# Altium PCB RobonAUT_PCB.PcbDoc
Units mm, origin at the board's own origin, x right, y up, seen from the top; angles counter-clockwise.
Board outline 153 x 126 mm, 2 copper layers (Top Layer, Bottom Layer), stack 1.586 mm thick; 34 components, 56 nets, 272 pads, 13 vias.
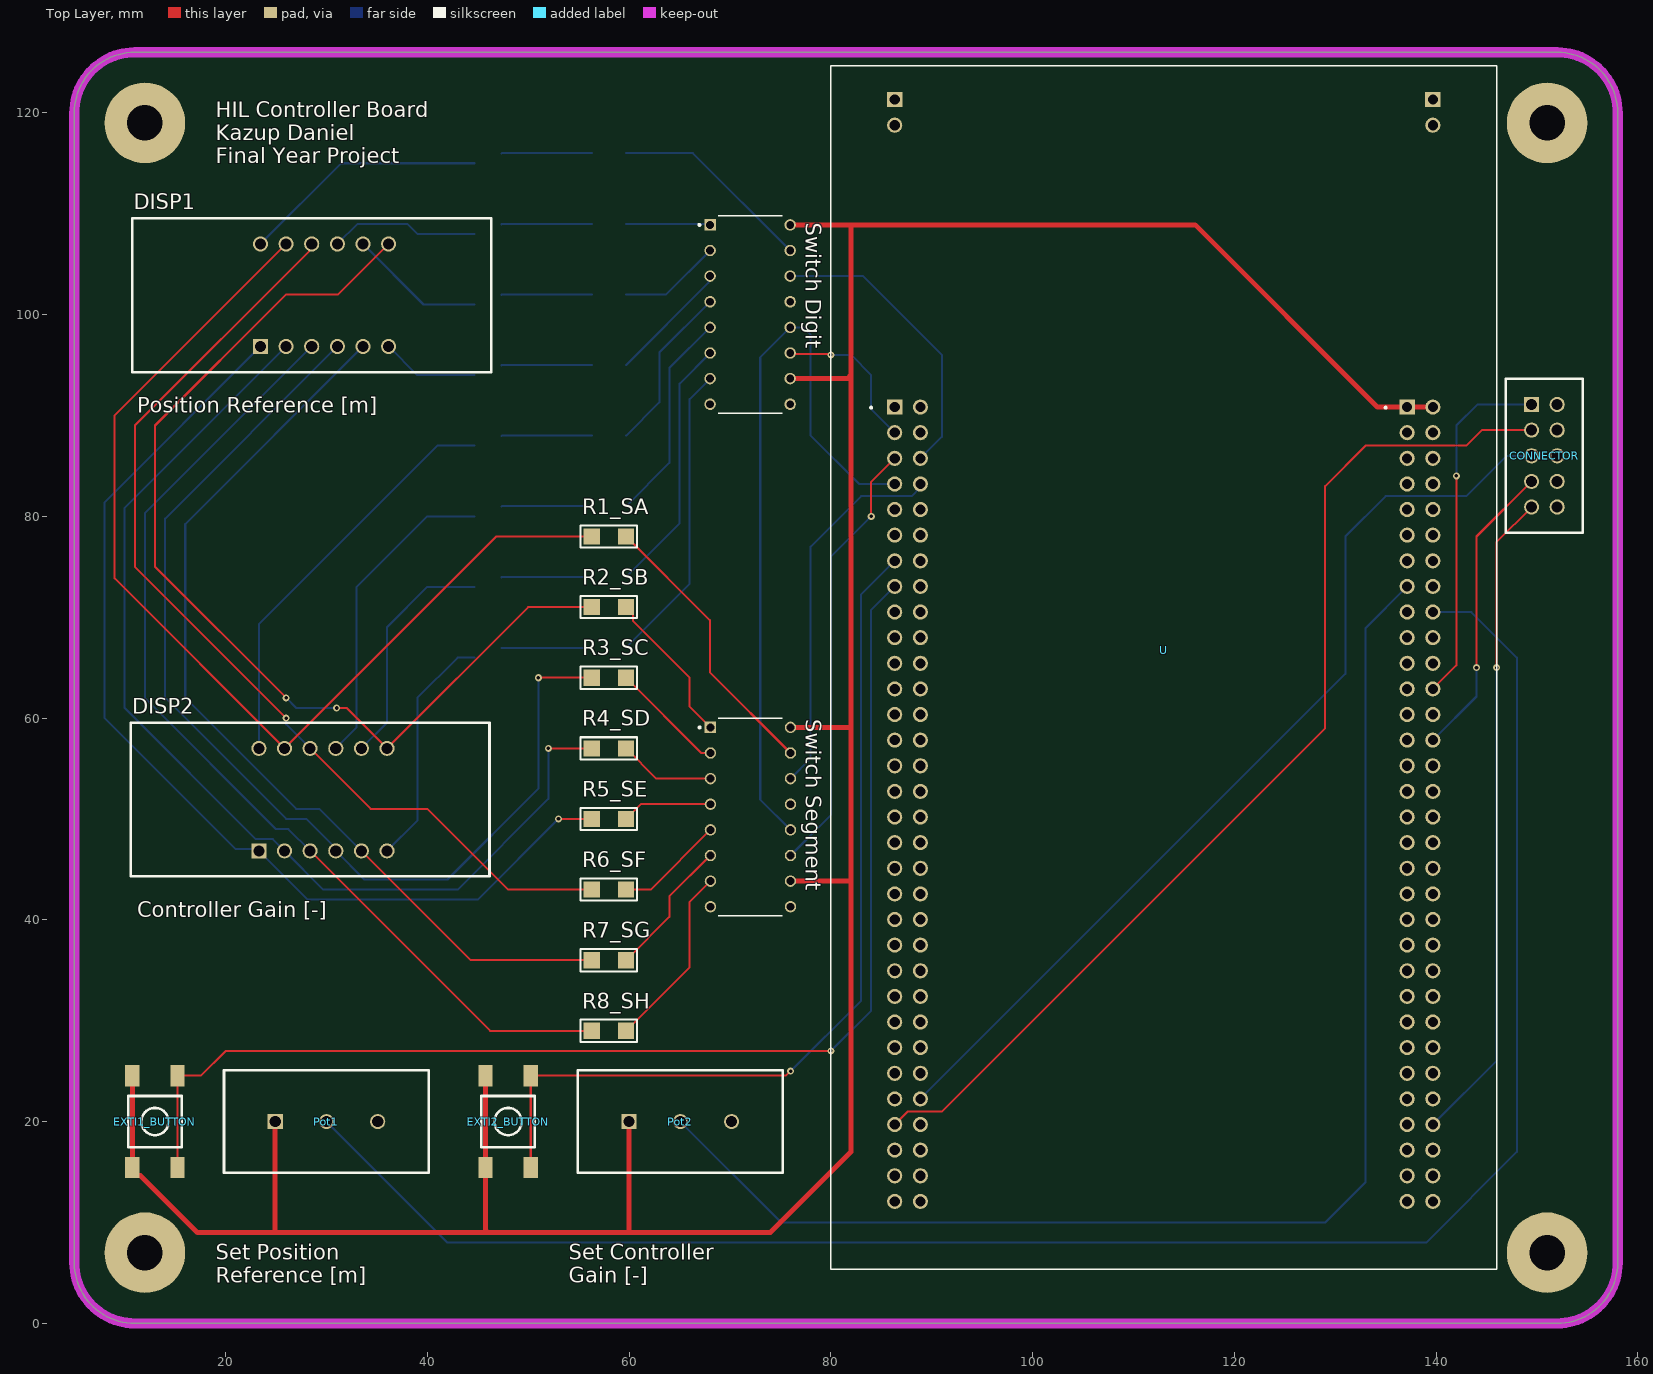
[diagram p0: Top Layer view]
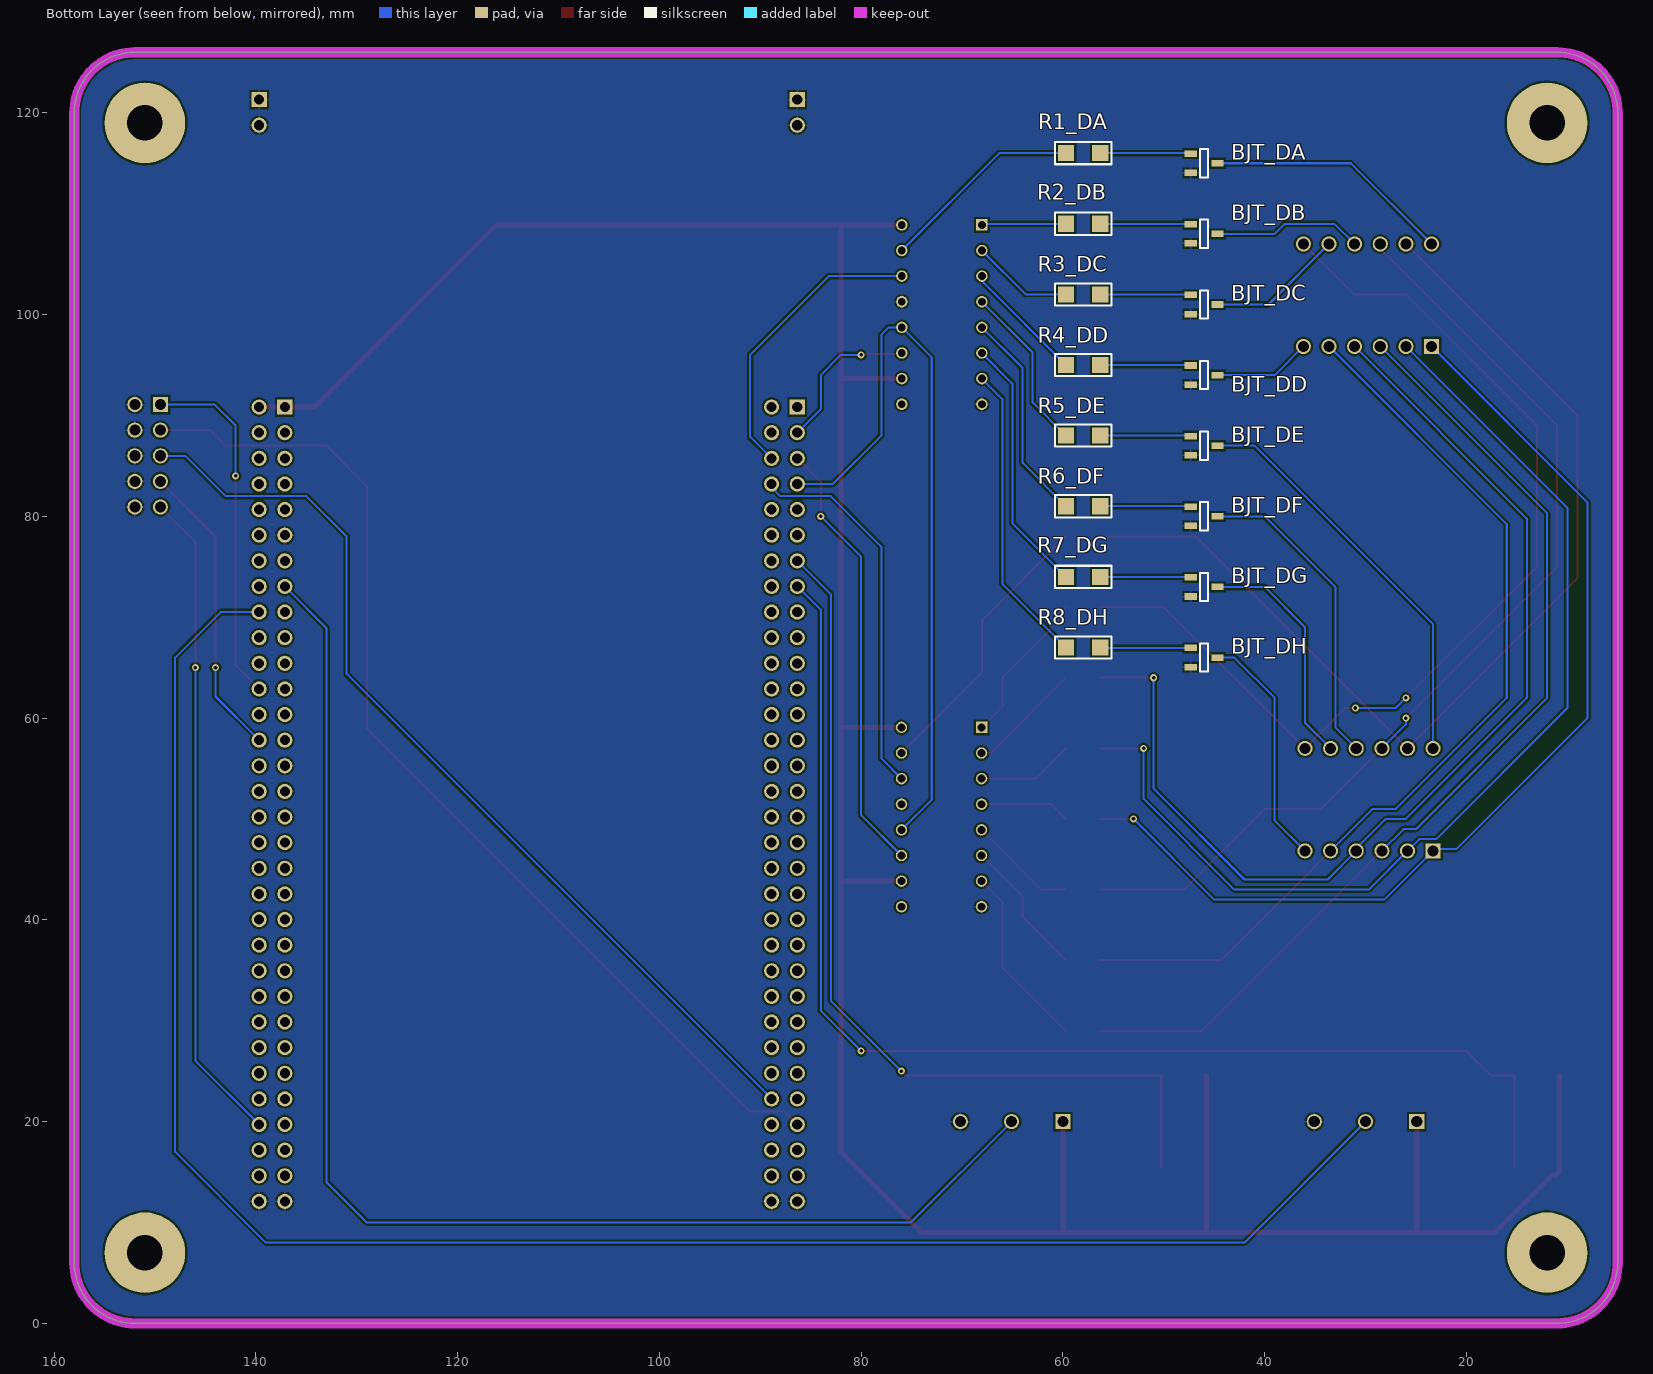
[diagram p1: Bottom Layer view, seen from below]
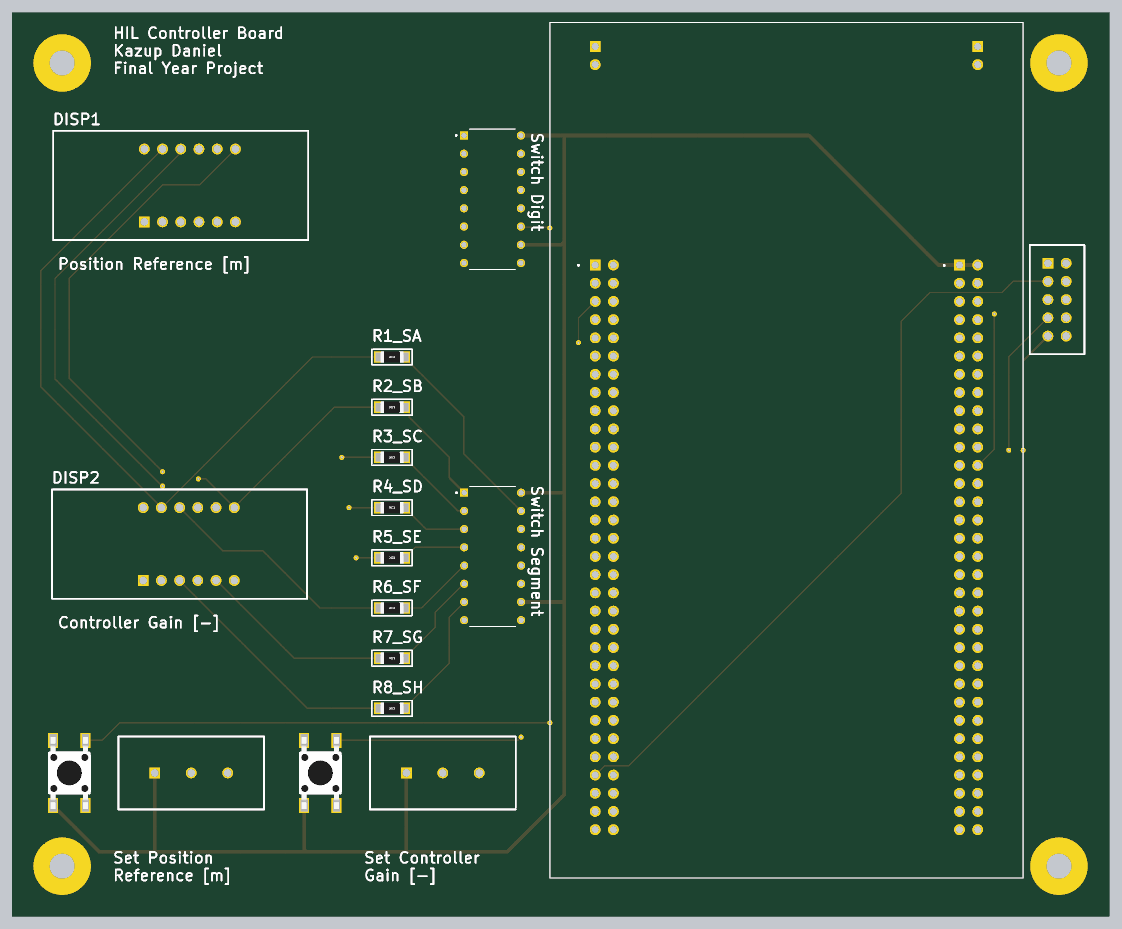
[diagram p2: 3D render of the assembled board from above, using the file's embedded part models]
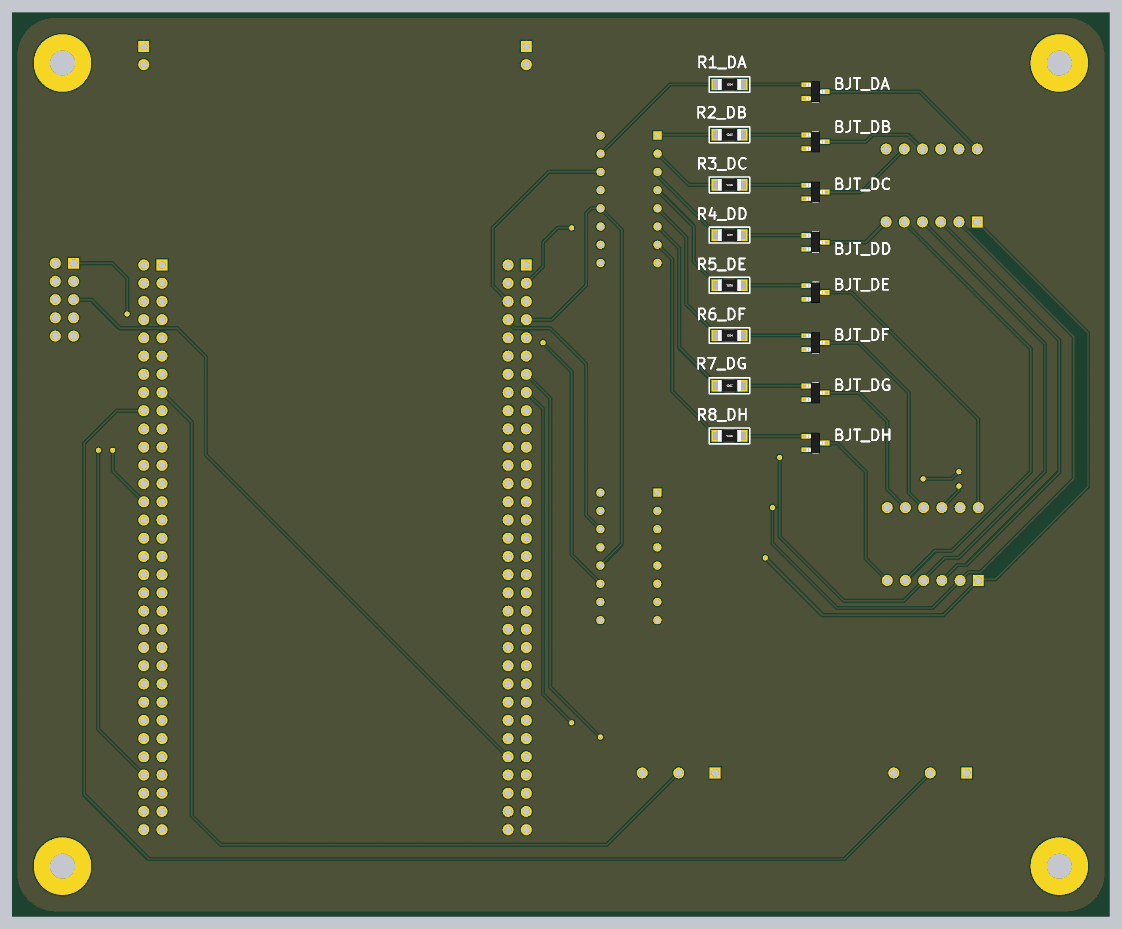
[diagram p3: 3D render of the assembled board from below, using the file's embedded part models]

## Layer stack, top to bottom
Top Solder: solder mask 0.0102, Solder Resist, Dk 3.5
Top Layer: signal copper 0.018
Dielectric1: core 1.55, FR-4, Dk 4.8
Bottom Layer: signal copper 0.018
Bottom Solder: solder mask 0.0102, Solder Resist, Dk 3.5

## Board outline
11,0 152,0 ccw(c152,6) 158,6 158,120 ccw(c152,120) 152,126 11,126 ccw(c11,120) 5,120 5,6 ccw(c11,6)

## Design rules (kind name [scope] priority, off if disabled: settings)
BoardOutlineClearance [All] p1: gap=0.25 ignorepadtopadclearanceinfootprint=FALSE
Clearance Clearance-xPP-xTP-xTT [All] p1: gap=0.15 ignorepadtopadclearanceinfootprint=FALSE except(0: Arc-Hole Track-Hole SMDPad-Hole THPad-Hole Via-Hole Fill-Hole Poly-Hole Region-Hole Text-Hole; 0.2: Arc-Poly Track-Poly SMDPad-Poly THPad-Poly Via-Poly Fill-Poly Poly-Poly)
ComponentClearance [All] p1: gap=0.25 collisioncheckmode=3 verticalgap=0.25 showdistances=FALSE
DiffPairsRouting [All] p1: maxlimit=0.25 minlimit=0.25 mostfreqgap=0.25 toplayer_minwidth=0.381 toplayer_maxwidth=0.381 toplayer_prefwidth=0.381 bottomlayer_minwidth=0.381 bottomlayer_maxwidth=0.381 bottomlayer_prefwidth=0.381 maxuncoupledlength=12.5
Height [All] p1: minheight=0 maxheight=45 prefheight=12.5
HoleSize HoleSize-PTH [All] p1: absolutevalues=TRUE maxlimit=5 minlimit=0.25 maxpercent=80.000 minpercent=20.000
HoleToHoleClearance [All] p1: gap=0.4 allowstackedmicrovias=TRUE
MinimumAnnularRing [All] p1: minimumring=0.125
MinimumSolderMaskSliver [All] p1: minsoldermaskwidth=0.08
PasteMaskExpansion [All] p1: expansion=-0.2
PlaneClearance PlaneClearance-IPI [All] p1: clearance=0.2
PlaneConnect [All] p1: pad.planeconnectstyle=Relief pad.reliefexpansion=0.175 pad.reliefentries=4 pad.reliefconductorwidth=0.2 pad.reliefairgap=0.2 via.planeconnectstyle=Direct via.reliefexpansion=0.175 via.reliefentries=4 via.reliefconductorwidth=0.2 via.reliefairgap=0.2
PolygonConnect PolygonConnect-xTW [All] p1: thpad.connectstyle=Relief thpad.reliefconductorwidth=0.2 thpad.reliefentries=4 thpad.polygonreliefangle="90 Angle" thpad.airgapwidth=0.2 smdpad.connectstyle=Relief smdpad.reliefconductorwidth=0.2 smdpad.reliefentries=4 smdpad.polygonreliefangle="90 Angle" smdpad.airgapwidth=0.2 via.connectstyle=Direct via.reliefconductorwidth=0.2 via.reliefentries=4 via.polygonreliefangle="90 Angle" via.airgapwidth=0.2
RoutingCorners [All] p1: cornerstyle=45-Degree minsetback=2.5 maxsetback=2.5
RoutingVias [All] p1: holewidth=0.35 width=0.7 viastyle="Through Hole" minholewidth=0.25 minwidth=0.6 maxholewidth=1.2 maxwidth=1.6
SilkToSilkClearance [All] p1: silktosilkclearance=0.05
SilkToSolderMaskClearance SilkscreenOverComponentPads [IsPad] p1: minsilkscreentomaskgap=0.15 clearancetoexposedcopper=TRUE
SolderMaskExpansion [All] p1: expansion=0 istentingtop=FALSE
SupplyNets "Schematic Supply Nets_1" [InNet('GND')] p1: voltage=0.000
SupplyNets "Schematic Supply Nets" [InNet('3V3')] p2: voltage=0.000
UnRoutedNet [All] p1: checkbadconnections=TRUE
Width Width-xTW [All] p1: maxlimit=3 minlimit=0.15 preferedwidth=0.2
17 further rules are at their usual default settings.

## Classes and differential pairs
component class MainSch: CONNECTOR U
component class HMISch: BJT_DA BJT_DB BJT_DC BJT_DD BJT_DE BJT_DF BJT_DG BJT_DH DISP1 DISP2 EXTI1_BUTTON EXTI2_BUTTON Pot1 Pot2 R1_DA R1_SA R2_DB R2_SB R3_DC R3_SC R4_DD R4_SD R5_DE R5_SE R6_DF R6_SF R7_DG R7_SG R8_DH R8_SH "Switch Digit" "Switch Segment"

## Components (designator, comment, footprint, x,y, rotation, side; value= is the part's Value field where it differs from the comment)
BJT_DA "BC817" FP_SOT23-3 46,115 r0 bottom
BJT_DB "BC817" FP_SOT23-3 46,108 r0 bottom
BJT_DC "BC817" FP_SOT23-3 46,101 r0 bottom
BJT_DD "BC817" FP_SOT23-3 46,94 r0 bottom
BJT_DE "BC817" FP_SOT23-3 46,87 r0 bottom
BJT_DF "BC817" FP_SOT23-3 46,80 r0 bottom
BJT_DG "BC817" FP_SOT23-3 46,73 r0 bottom
BJT_DH "BC817" FP_SOT23-3 46,66 r0 bottom
CONNECTOR "Connector 10" CONNECTOR-10P 149.46,91.08 r0 top locked
DISP1 "7SegDisp" 3461AS_FP 23.46,96.84 r90 top locked
DISP2 "7SegDisp" 3461AS_FP 23.3,46.84 r90 top locked
EXTI1_BUTTON "Button" FP_BTN_SMD 13,20 r0 top locked
EXTI2_BUTTON "Button" FP_BTN_SMD 48,20 r0 top locked
Pot1 "Connector" Potmeter_3C_FP 24.92,20 r90 top locked
Pot2 "Connector" Potmeter_3C_FP 60,20 r90 top locked
R1_DA "4.7K" FP_1206_RES 58,116 r180 bottom
R1_SA "100" FP_1206_RES 58,78 r180 top
R2_DB "4.7K" FP_1206_RES 58,109 r180 bottom
R2_SB "100" FP_1206_RES 58,71 r180 top
R3_DC "4.7K" FP_1206_RES 58,102 r180 bottom
R3_SC "100" FP_1206_RES 58,64 r180 top
R4_DD "4.7K" FP_1206_RES 58,95 r180 bottom
R4_SD "100" FP_1206_RES 58,57 r180 top
R5_DE "4.7K" FP_1206_RES 58,88 r180 bottom
R5_SE "100" FP_1206_RES 58,50 r180 top
R6_DF "4.7K" FP_1206_RES 58,81 r180 bottom
R6_SF "100" FP_1206_RES 58,43 r180 top
R7_DG "4.7K" FP_1206_RES 58,74 r180 bottom
R7_SG "100" FP_1206_RES 58,36 r180 top
R8_DH "4.7K" FP_1206_RES 58,67 r180 bottom
R8_SH "100" FP_1206_RES 58,29 r180 top
"Switch Digit" "SN74HC595N" DIP794W45P254L1969H508Q16 72,100 r0 top locked
"Switch Segment" "SN74HC595N" DIP794W45P254L1969H508Q16 72.03,50.19 r0 top locked
U "STM32F429I-DISC1" MODULE_STM32F429I-DISC1 113,65 r0 top locked

## Footprints (in the part's own frame and the unit in brackets; to place one, negate y for a bottom-side part, rotate by r counter-clockwise, add the part's x,y. Pads: shape width x height; smd on the part's side, far side on the other; paste and mask are expansions set on the pad)
3461AS_FP [mm] "7 segment display footprint"
  rect 1.5x1.5 hole 1.1: 1(0,0)
  round 1.5 hole 1.1: 2(10.16,0) 3(0,-2.54) 4(10.16,-2.54) 5(0,-5.08) 6(10.16,-5.08) 7(0,-7.62) 8(10.16,-7.62) 9(0,-10.16) 10(10.16,-10.16) 11(0,-12.7) 12(10.16,-12.7)
  silkscreen extent -2.54,-22.86 12.7,12.7
CONNECTOR-10P [mm]
  rect 1.5x1.5 hole 1.1: 1(0,0)
  round 1.5 hole 1.1: 2(2.54,0) 3(0,-2.54) 4(2.54,-2.54) 5(0,-5.08) 6(2.54,-5.08) 7(0,-7.62) 8(2.54,-7.62) 9(0,-10.16) 10(2.54,-10.16)
  silkscreen extent -2.54,-12.7 5.08,2.54
DIP794W45P254L1969H508Q16 [mm]
  rect 1.13x1.13 hole 0.78: 1(-3.97,8.89)
  round 1.13 hole 0.78: 2(-3.97,6.35) 3(-3.97,3.81) 4(-3.97,1.27) 5(-3.97,-1.27) 6(-3.97,-3.81) 7(-3.97,-6.35) 8(-3.97,-8.89) 9(3.97,-8.89) 10(3.97,-6.35) 11(3.97,-3.81) 12(3.97,-1.27) 13(3.97,1.27) 14(3.97,3.81) 15(3.97,6.35) 16(3.97,8.89)
  silkscreen extent -5.13,-9.77 3.17,9.77
FP_1206_RES [mm] "1206 ellenállás"
  rect 1.6x1.6 smd: 1(-1.7,0) 2(1.7,0)
  silkscreen extent -2.8,-1.1 2.8,1.1, body extent -1.6,-0.8 1.6,0.8, height 0.62
FP_BTN_SMD [mm] "SMD Push Button 6x6mm"
  rect 1.4x2.1 smd: 1(2.25,4.55) 2(2.25,-4.55) 3(-2.25,4.55) 4(-2.25,-4.55)
  silkscreen extent -2.67,-2.54 2.67,2.54, body extent -3,-5 3,5, height 5.1
FP_SOT23-3 [mm] "SOT23-3 tok"
  rect 1.2x0.65 smd: 1(1.327,-0.95) 2(1.327,0.95) 3(-1.327,0)
  silkscreen extent -0.4,-1.4 0.4,1.4, body extent -1.27,-1.46 1.27,1.46, height 0.97
MODULE_STM32F429I-DISC1 [mm]
  rect 1.5x1.5 hole 1: JP1_1(-26.67,56.31) JP2_1(26.67,56.31) P1_1(-26.67,25.83) P2_1(24.13,25.83)
  round 1.5 hole 1: JP1_2(-26.67,53.77) JP2_2(26.67,53.77) P1_2(-24.13,25.83) P1_3(-26.67,23.29) P1_4(-24.13,23.29) P1_5(-26.67,20.75) P1_6(-24.13,20.75) P1_7(-26.67,18.21) P1_8(-24.13,18.21) P1_9(-26.67,15.67) P1_10(-24.13,15.67) P1_11(-26.67,13.13) P1_12(-24.13,13.13) P1_13(-26.67,10.59) P1_14(-24.13,10.59) P1_15(-26.67,8.05) P1_16(-24.13,8.05) P1_17(-26.67,5.51) P1_18(-24.13,5.51) P1_19(-26.67,2.97) P1_20(-24.13,2.97) P1_21(-26.67,0.43) P1_22(-24.13,0.43) P1_23(-26.67,-2.11) P1_24(-24.13,-2.11) P1_25(-26.67,-4.65) P1_26(-24.13,-4.65) P1_27(-26.67,-7.19) P1_28(-24.13,-7.19) P1_29(-26.67,-9.73) P1_30(-24.13,-9.73) P1_31(-26.67,-12.27) P1_32(-24.13,-12.27) P1_33(-26.67,-14.81) P1_34(-24.13,-14.81) P1_35(-26.67,-17.35) P1_36(-24.13,-17.35) P1_37(-26.67,-19.89) P1_38(-24.13,-19.89) P1_39(-26.67,-22.43) P1_40(-24.13,-22.43) P1_41(-26.67,-24.97) P1_42(-24.13,-24.97) P1_43(-26.67,-27.51) P1_44(-24.13,-27.51) P1_45(-26.67,-30.05) P1_46(-24.13,-30.05) P1_47(-26.67,-32.59) P1_48(-24.13,-32.59) P1_49(-26.67,-35.13) P1_50(-24.13,-35.13) P1_51(-26.67,-37.67) P1_52(-24.13,-37.67) P1_53(-26.67,-40.21) P1_54(-24.13,-40.21) P1_55(-26.67,-42.75) P1_56(-24.13,-42.75) P1_57(-26.67,-45.29) P1_58(-24.13,-45.29) P1_59(-26.67,-47.83) P1_60(-24.13,-47.83) P1_61(-26.67,-50.37) P1_62(-24.13,-50.37) P1_63(-26.67,-52.91) P1_64(-24.13,-52.91) P2_2(26.67,25.83) P2_3(24.13,23.29) P2_4(26.67,23.29) P2_5(24.13,20.75) P2_6(26.67,20.75) P2_7(24.13,18.21) P2_8(26.67,18.21) P2_9(24.13,15.67) P2_10(26.67,15.67) P2_11(24.13,13.13) P2_12(26.67,13.13) P2_13(24.13,10.59) P2_14(26.67,10.59) P2_15(24.13,8.05) P2_16(26.67,8.05) P2_17(24.13,5.51) P2_18(26.67,5.51) P2_19(24.13,2.97) P2_20(26.67,2.97) P2_21(24.13,0.43) P2_22(26.67,0.43) P2_23(24.13,-2.11) P2_24(26.67,-2.11) P2_25(24.13,-4.65) P2_26(26.67,-4.65) P2_27(24.13,-7.19) P2_28(26.67,-7.19) P2_29(24.13,-9.73) P2_30(26.67,-9.73) P2_31(24.13,-12.27) P2_32(26.67,-12.27) P2_33(24.13,-14.81) P2_34(26.67,-14.81) P2_35(24.13,-17.35) P2_36(26.67,-17.35) P2_37(24.13,-19.89) P2_38(26.67,-19.89) P2_39(24.13,-22.43) P2_40(26.67,-22.43) P2_41(24.13,-24.97) P2_42(26.67,-24.97) P2_43(24.13,-27.51) P2_44(26.67,-27.51) P2_45(24.13,-30.05) P2_46(26.67,-30.05) P2_47(24.13,-32.59) P2_48(26.67,-32.59) P2_49(24.13,-35.13) P2_50(26.67,-35.13) P2_51(24.13,-37.67) P2_52(26.67,-37.67) P2_53(24.13,-40.21) P2_54(26.67,-40.21) P2_55(24.13,-42.75) P2_56(26.67,-42.75) P2_57(24.13,-45.29) P2_58(26.67,-45.29) P2_59(24.13,-47.83) P2_60(26.67,-47.83) P2_61(24.13,-50.37) P2_62(26.67,-50.37) P2_63(24.13,-52.91) P2_64(26.67,-52.91)
  silkscreen extent -33,-59.65 33,59.65
Potmeter_3C_FP [mm] "3 pin potmeter"
  rect 1.5x1.5 hole 1.1: 1(0,0)
  round 1.5 hole 1.1: 2(0,-5.08) 3(0,-10.16)
  silkscreen extent -5.08,-15.24 5.08,5.08

## Part data
BJT_DA BJT_DB BJT_DC BJT_DD BJT_DE BJT_DF BJT_DG BJT_DH: "NPN General-purpose Transistor", ComponentLink1Description="Manufacturer Link", ComponentLink1URL=http://www.semiconductors.philips.com/, ComponentLink2Description=Datasheet, ComponentLink2URL=http://www.semiconductors.philips.com/acrobat/datasheets/BC817_BC817W_BC337_5.pdf
CONNECTOR: library part "Connector 10 spec", "Special 10 pin ribbon connector"
DISP1 DISP2: library part 3461AS, "7 segment display sch"
EXTI1_BUTTON EXTI2_BUTTON: library part "Button 4P", "Push button"
Pot1 Pot2: library part Potmeter_3pin, "3pin connector"
R1_DA R1_SA R2_DB R2_SB R3_DC R3_SC R4_DD R4_SD R5_DE R5_SE R6_DF R6_SF R7_DG R7_SG R8_DH R8_SH: library part RES, "Resistor"
"Switch Digit" "Switch Segment": Package=None, Availability=Unavailable, MP=SN74HC595N, Price=None
U: "STM32F429 Discovery STM32F4 ARMÂ® CortexÂ®-M4 MCU 32-Bit Embedded Evaluation Board", Package="SOIC-14 STMicroelectronics", Availability=Unavailable, MF=STMicroelectronics, MP=STM32F429I-DISC1, Price=None, SnapEDA_Link=https://www.snapeda.com/parts/STM32F429I-DISC1/STMicroelectronics/view-part/504905/?ref=snap

## Free pads (board coordinates)
  round 8 hole 3.5: 1(12,119) 2(12,7) 3(151,119) 4(151,7)

## Via types
v1: diameter 0.7, hole 0.35, Top Layer to Bottom Layer, 13 vias

## Nets (pads, with @x,y where several pads share a name; then routed paths per layer and width w, separated by ;. In a path a pad name is that pad's centre, name@x,y a point inside that pad or via, vN(x,y) a via of type N, cw(c..) or ccw(c..) an arc to the next point about the centre after c; other vN are vias at no path point)
3V3: "Switch Digit.10" "Switch Digit.16" "Switch Segment.10" "Switch Segment.16" EXTI1_BUTTON.3 EXTI1_BUTTON.4 EXTI2_BUTTON.3 EXTI2_BUTTON.4 Pot1.1 Pot2.1 U.P2_1 U.P2_2 | length 305.6
  Top Layer w0.5: EXTI1_BUTTON.3 EXTI1_BUTTON.4 10.75,15.1 11.2,14.65 11.55,14.65 17.2,9 25,9 ; Pot1.1 24.92,9.08 25,9 ; EXTI2_BUTTON.3 EXTI2_BUTTON.4 45.75,9.25 46,9 ; Pot2.1 60,9 ; 75.97,93.65 81.65,93.65 82,94 ; 75.97,108.89 82,108.89 ; 76,43.84 81.84,43.84 82,44 ; 76,59.08 81.92,59.08 82,59 ; U.P2_2 U.P2_1 134.17,90.83 116.11,108.89 82,108.89 ; 25,9 46,9 ; 46,9 60,9 ; 60,9 74,9 82,17 82,44 ; 82,44 82,59 ; 82,59 82,94 ; 82,94 82,108.89
GND: "Switch Digit.8" "Switch Digit.13" "Switch Segment.8" "Switch Segment.13" BJT_DA.2 BJT_DB.2 BJT_DC.2 BJT_DD.2 BJT_DE.2 BJT_DF.2 BJT_DG.2 BJT_DH.2 CONNECTOR.2 CONNECTOR.4 CONNECTOR.6 CONNECTOR.8 CONNECTOR.10 Pot1.3 Pot2.3 U.JP1_1 U.JP1_2 U.JP2_1 U.JP2_2 U.P1_63 U.P1_64 U.P2_11 U.P2_29 U.P2_63 U.P2_64
NetBJT_DA_1: BJT_DA.1 R1_DA.2 | length 9
  Bottom Layer w0.2: BJT_DA.1 47.377,116 R1_DA.2
NetBJT_DA_3: BJT_DA.3 DISP1.2 | length 24.5
  Bottom Layer w0.2: DISP1.2 31.46,115 BJT_DA.3
NetBJT_DB_1: BJT_DB.1 R2_DB.2 | length 9
  Bottom Layer w0.2: BJT_DB.1 47.377,109 R2_DB.2
NetBJT_DB_3: BJT_DB.3 DISP1.8 | length 14.8
  Bottom Layer w0.2: DISP1.8 33.08,109 38,109 39,108 BJT_DB.3
NetBJT_DC_1: BJT_DC.1 R3_DC.2 | length 9
  Bottom Layer w0.2: BJT_DC.1 47.377,102 R3_DC.2
NetBJT_DC_3: BJT_DC.3 DISP1.10 | length 13.5
  Bottom Layer w0.2: DISP1.10 39.62,101 BJT_DC.3
NetBJT_DD_1: BJT_DD.1 R4_DD.2 | length 9
  Bottom Layer w0.2: BJT_DD.1 47.377,95 R4_DD.2
NetBJT_DD_3: BJT_DD.3 DISP1.11 | length 9.7
  Bottom Layer w0.2: DISP1.11 39,94 BJT_DD.3
NetBJT_DE_1: BJT_DE.1 R5_DE.2 | length 9
  Bottom Layer w0.2: BJT_DE.1 47.377,88 R5_DE.2
NetBJT_DE_3: BJT_DE.3 DISP2.2 | length 41
  Bottom Layer w0.2: DISP2.2 23.3,69.3 41,87 BJT_DE.3
NetBJT_DF_1: BJT_DF.1 R6_DF.2 | length 9
  Bottom Layer w0.2: BJT_DF.1 47.377,81 R6_DF.2
NetBJT_DF_3: BJT_DF.3 DISP2.8 | length 31.4
  Bottom Layer w0.2: DISP2.8 33,59.08 33,73 40,80 BJT_DF.3
NetBJT_DG_1: BJT_DG.1 R7_DG.2 | length 9
  Bottom Layer w0.2: BJT_DG.1 47.377,74 R7_DG.2
NetBJT_DG_3: BJT_DG.3 DISP2.10 | length 23.4
  Bottom Layer w0.2: DISP2.10 36,59.54 36,69 40,73 BJT_DG.3
NetBJT_DH_1: BJT_DH.1 R8_DH.2 | length 9
  Bottom Layer w0.2: BJT_DH.1 56.25,66.95 R8_DH.2
NetBJT_DH_3: BJT_DH.3 DISP2.11 | length 23.7
  Bottom Layer w0.2: DISP2.11 39,49.84 39,62 43,66 BJT_DH.3
NetCONNECTOR_1: CONNECTOR.1 U.P2_24 | length 35.4
  Top Layer w0.2: U.P2_24 142,65.22 v1(142,84)
  Bottom Layer w0.2: v1(142,84) 142,89 144.08,91.08 CONNECTOR.1
NetCONNECTOR_3: CONNECTOR.3 U.P1_57 | length 105.7
  Top Layer w0.2: U.P1_57 87.599,20.979 90.979,20.979 129,59 129,83 133,87 143,87 144.54,88.54 CONNECTOR.3
NetCONNECTOR_5: CONNECTOR.5 U.P1_56 | length 95
  Bottom Layer w0.2: U.P1_56 131,64.38 131,78 135,82 143,82 147,86 CONNECTOR.5
NetCONNECTOR_7: CONNECTOR.7 U.P2_28 | length 29.7
  Top Layer w0.2: v1(144,65) 144,78 CONNECTOR.7
  Bottom Layer w0.2: U.P2_28 144,62.14 v1(144,65)
NetCONNECTOR_9: CONNECTOR.9 U.P2_58 | length 65.3
  Top Layer w0.2: v1(146,65) 146,77.46 CONNECTOR.9
  Bottom Layer w0.2: U.P2_58 146,26.04 v1(146,65)
NetDISP1_1: DISP1.1 DISP2.1 R5_SE.2 | length 102.3
  Top Layer w0.2: v1(53,50) R5_SE.2
  Bottom Layer w0.2: DISP1.1 8,81.38 8,60 21,47 23.14,47 28.14,42 45,42 v1(53,50)
NetDISP1_3: DISP1.3 DISP2.3 R4_SD.2 | length 105
  Top Layer w0.2: v1(52,57) R4_SD.2
  Bottom Layer w0.2: DISP1.3 10,80.84 10,61 23,48 24.68,48 DISP2.3 29.68,43 43,43 52,52 v1(52,57)
NetDISP1_4: DISP1.4 DISP2.4 R1_SA.2 | length 103.2
  Top Layer w0.2: DISP1.4 9,90 9,73.84 DISP2.4 46.84,78 R1_SA.2
NetDISP1_5: DISP1.5 DISP2.5 R8_SH.2 | length 99.7
  Top Layer w0.2: DISP2.5 46.22,29 R8_SH.2
  Bottom Layer w0.2: DISP2.5 26.22,49 25,49 12,62 12,80.3 DISP1.5
NetDISP1_6: DISP1.6 DISP2.6 R6_SF.2 | length 98.2
  Top Layer w0.2: v1(26,60) 11,75 11,89 28.291,106.291 28.291,106.751 DISP1.6 ; DISP2.6 34.38,51 40,51 48,43 R6_SF.2
  Bottom Layer w0.2: v1(26,60) 26,59.38 DISP2.6
NetDISP1_7: DISP1.7 DISP2.7 R3_SC.2 | length 106.5
  Top Layer w0.2: v1(51,64) R3_SC.2
  Bottom Layer w0.2: DISP1.7 14,79.76 14,62 26,50 28,50 30.92,47.08 DISP2.7 33.76,44 42,44 51,53 v1(51,64)
NetDISP1_9: DISP1.9 DISP2.9 R7_SG.2 | length 93.2
  Top Layer w0.2: DISP2.9 44.3,36 R7_SG.2
  Bottom Layer w0.2: DISP2.9 29.3,51 27,51 16,62 16,79.22 DISP1.9
NetDISP1_12: DISP1.12 DISP2.12 R2_SB.2 | length 101.2
  Top Layer w0.2: v1(26,62) 13,75 13,89 26,102 31.16,102 DISP1.12 ; v1(31,61) 32,61 DISP2.12 50,71 R2_SB.2
  Bottom Layer w0.2: v1(26,62) 27,61 v1(31,61)
NetEXTI1_BUTTON_1: EXTI1_BUTTON.1 EXTI1_BUTTON.2 U.P1_15 | length 123.5
  Top Layer w0.2: EXTI1_BUTTON.2 EXTI1_BUTTON.1 17.55,24.55 20,27 v1(80,27)
  Bottom Layer w0.2: v1(80,27) 84,31 84,70.72 U.P1_15
NetEXTI2_BUTTON_1: EXTI2_BUTTON.1 EXTI2_BUTTON.2 U.P1_13 | length 89.9
  Top Layer w0.2: EXTI2_BUTTON.2 EXTI2_BUTTON.1 75.531,24.55 75.981,25 v1(76,25)
  Bottom Layer w0.2: v1(76,25) 83,32 83,72.26 U.P1_13
NetPot1_2: Pot1.2 U.P2_18 | length 185.9
  Bottom Layer w0.2: Pot1.2 42,8 139,8 148,17 148,66 143.49,70.51 U.P2_18
NetPot2_2: Pot2.2 U.P2_15 | length 134.5
  Bottom Layer w0.2: Pot2.2 75.08,10 129,10 133,14 133,68.92 U.P2_15
NetR1_DA_1: "Switch Digit.15" R1_DA.1 | length 20.3
  Bottom Layer w0.2: R1_DA.1 66.32,116 75.97,106.35
NetR1_SA_1: "Switch Segment.15" R1_SA.1 | length 28.2
  Top Layer w0.2: R1_SA.1 68,69.7 68,64.54 76,56.54
NetR2_DB_1: "Switch Digit.1" R2_DB.1 | length 8.4
  Bottom Layer w0.2: R2_DB.1 67.92,109 68.03,108.89
NetR2_SB_1: "Switch Segment.1" R2_SB.1 | length 15.4
  Top Layer w0.2: R2_SB.1 60.4,70.3 60.4,69.6 66,64 66,61.14 68.06,59.08
NetR3_DC_1: "Switch Digit.2" R3_DC.1 | length 10.1
  Bottom Layer w0.2: R3_DC.1 63.68,102 68.03,106.35
NetR3_SC_1: "Switch Segment.2" R3_SC.1 | length 11.5
  Top Layer w0.2: R3_SC.1 67.16,56.54 68.06,56.54
NetR4_DD_1: "Switch Digit.3" R4_DD.1 | length 12.3
  Bottom Layer w0.2: R4_DD.1 67.852,103.152 67.852,103.632 68.03,103.81
NetR4_SD_1: "Switch Segment.3" R4_SD.1 | length 9.6
  Top Layer w0.2: R4_SD.1 62.7,54 68.06,54
NetR5_DE_1: "Switch Digit.4" R5_DE.1 | length 16.7
  Bottom Layer w0.2: R5_DE.1 63,91.3 63,96.24 68.03,101.27
NetR5_SE_1: "Switch Segment.4" R5_SE.1 | length 9
  Top Layer w0.2: R5_SE.1 61.16,51.46 68.06,51.46
NetR6_DF_1: "Switch Digit.5" R6_DF.1 | length 21.2
  Bottom Layer w0.2: R6_DF.1 64,85.3 64,94.7 68.03,98.73
NetR6_SF_1: "Switch Segment.5" R6_SF.1 | length 10.8
  Top Layer w0.2: R6_SF.1 62.14,43 68.06,48.92
NetR7_DG_1: "Switch Digit.6" R7_DG.1 | length 25.6
  Bottom Layer w0.2: R7_DG.1 65,79.3 65,93.16 68.03,96.19
NetR7_SG_1: "Switch Segment.6" R7_SG.1 | length 13.8
  Top Layer w0.2: R7_SG.1 64,40.3 64,42.32 68.06,46.38
NetR8_DH_1: "Switch Digit.7" R8_DH.1 | length 30.1
  Bottom Layer w0.2: R8_DH.1 66,73.3 66,91.62 68.03,93.65
NetR8_SH_1: "Switch Segment.7" R8_SH.1 | length 18.3
  Top Layer w0.2: R8_SH.1 66,35.3 66,41.78 68.06,43.84
"NetSwitch Digit_11": "Switch Digit.11" U.P1_3 | length 15.6
  Top Layer w0.2: 75.97,96.19 76.065,96.095 79.905,96.095 v1(80,96)
  Bottom Layer w0.2: v1(80,96) 82,96 84,94 84,90.62 U.P1_3
"NetSwitch Digit_12": "Switch Digit.12" "Switch Segment.12" U.P1_7 | length 74.9
  Bottom Layer w0.2: 76,48.92 73,51.92 73,95.76 75.97,98.73 77.27,98.73 78,98 78,88 82.79,83.21 U.P1_7
"NetSwitch Digit_14": "Switch Digit.14" U.P1_6 | length 29.4
  Bottom Layer w0.2: 75.97,103.81 83.19,103.81 91,96 91,87.88 U.P1_6
"NetSwitch Segment_11": "Switch Segment.11" U.P1_5 | length 43.6
  Top Layer w0.2: v1(84,80) 84,83.42 U.P1_5
  Bottom Layer w0.2: 76,46.38 80,50.38 80,76 v1(84,80)
"NetSwitch Segment_14": "Switch Segment.14" U.P1_8 | length 37.5
  Bottom Layer w0.2: 76,54 78,56 78,77 83,82 88,82 88.87,82.87 U.P1_8
pads on no net: "Switch Digit.9" "Switch Segment.9" U.P1_1 U.P1_2 U.P1_4 U.P1_9 U.P1_10 U.P1_11 U.P1_12 U.P1_14 U.P1_16 U.P1_17 U.P1_18 U.P1_19 U.P1_20 U.P1_21 U.P1_22 U.P1_23 U.P1_24 U.P1_25 U.P1_26 U.P1_27 U.P1_28 U.P1_29 U.P1_30 U.P1_31 U.P1_32 U.P1_33 U.P1_34 U.P1_35 U.P1_36 U.P1_37 U.P1_38 U.P1_39 U.P1_40 U.P1_41 U.P1_42 U.P1_43 U.P1_44 U.P1_45 U.P1_46 U.P1_47 U.P1_48 U.P1_49 U.P1_50 U.P1_51 U.P1_52 U.P1_53 U.P1_54 U.P1_55 U.P1_58 U.P1_59 U.P1_60 U.P1_61 U.P1_62 U.P2_3 U.P2_4 U.P2_5 U.P2_6 U.P2_7 U.P2_8 U.P2_9 U.P2_10 U.P2_12 U.P2_13 U.P2_14 U.P2_16 U.P2_17 U.P2_19 U.P2_20 U.P2_21 U.P2_22 U.P2_23 U.P2_25 U.P2_26 U.P2_27 U.P2_30 U.P2_31 U.P2_32 U.P2_33 U.P2_34 U.P2_35 U.P2_36 U.P2_37 U.P2_38 U.P2_39 U.P2_40 U.P2_41 U.P2_42 U.P2_43 U.P2_44 U.P2_45 U.P2_46 U.P2_47 U.P2_48 U.P2_49 U.P2_50 U.P2_51 U.P2_52 U.P2_53 U.P2_54 U.P2_55 U.P2_56 U.P2_57 U.P2_59 U.P2_60 U.P2_61 U.P2_62

## Polygon pours and split planes (outlines as drawn)
GND on Bottom Layer "GND_L02_P000" (solid, remove dead copper, pour order 0): -9,140 183,140 183,-12 179,-16 175,-12 -12,-12

## Keep-outs
Keep-Out Layer:
  the board outline again, w1

## Silkscreen, mask and mechanical layers (free items; w line width, h text height)
Top Overlay:
  text "HIL Controller Board / Kazup Daniel / Final Year Project" at 19,115 h1.52
  text "Position Reference [m]" at 11.254,90.254 h1.52
  text "Controller Gain [-]" at 11.254,40.254 h1.52
  text "Set Position / Reference [m]" at 19,4 h1.52
  text "Set Controller / Gain [-]" at 54,4 h1.52
Mechanical 1:
  the board outline again, w0.2
  text ".Pcb_File_Name_No_Path" at 0,-2.5 h1.52